# Altium PCB Power_Distribution_Board.PcbDoc
Units mm, origin at the board's own origin, x right, y up, seen from the top; angles counter-clockwise.
Board outline 90 x 100 mm, 4 copper layers (Top Layer, Int1 (GND), Int2 (GND), Bottom Layer), stack 1.369 mm thick; 35 components, 23 nets, 107 pads, 4 vias.
Unrouted connection lines stored in the file: 17.
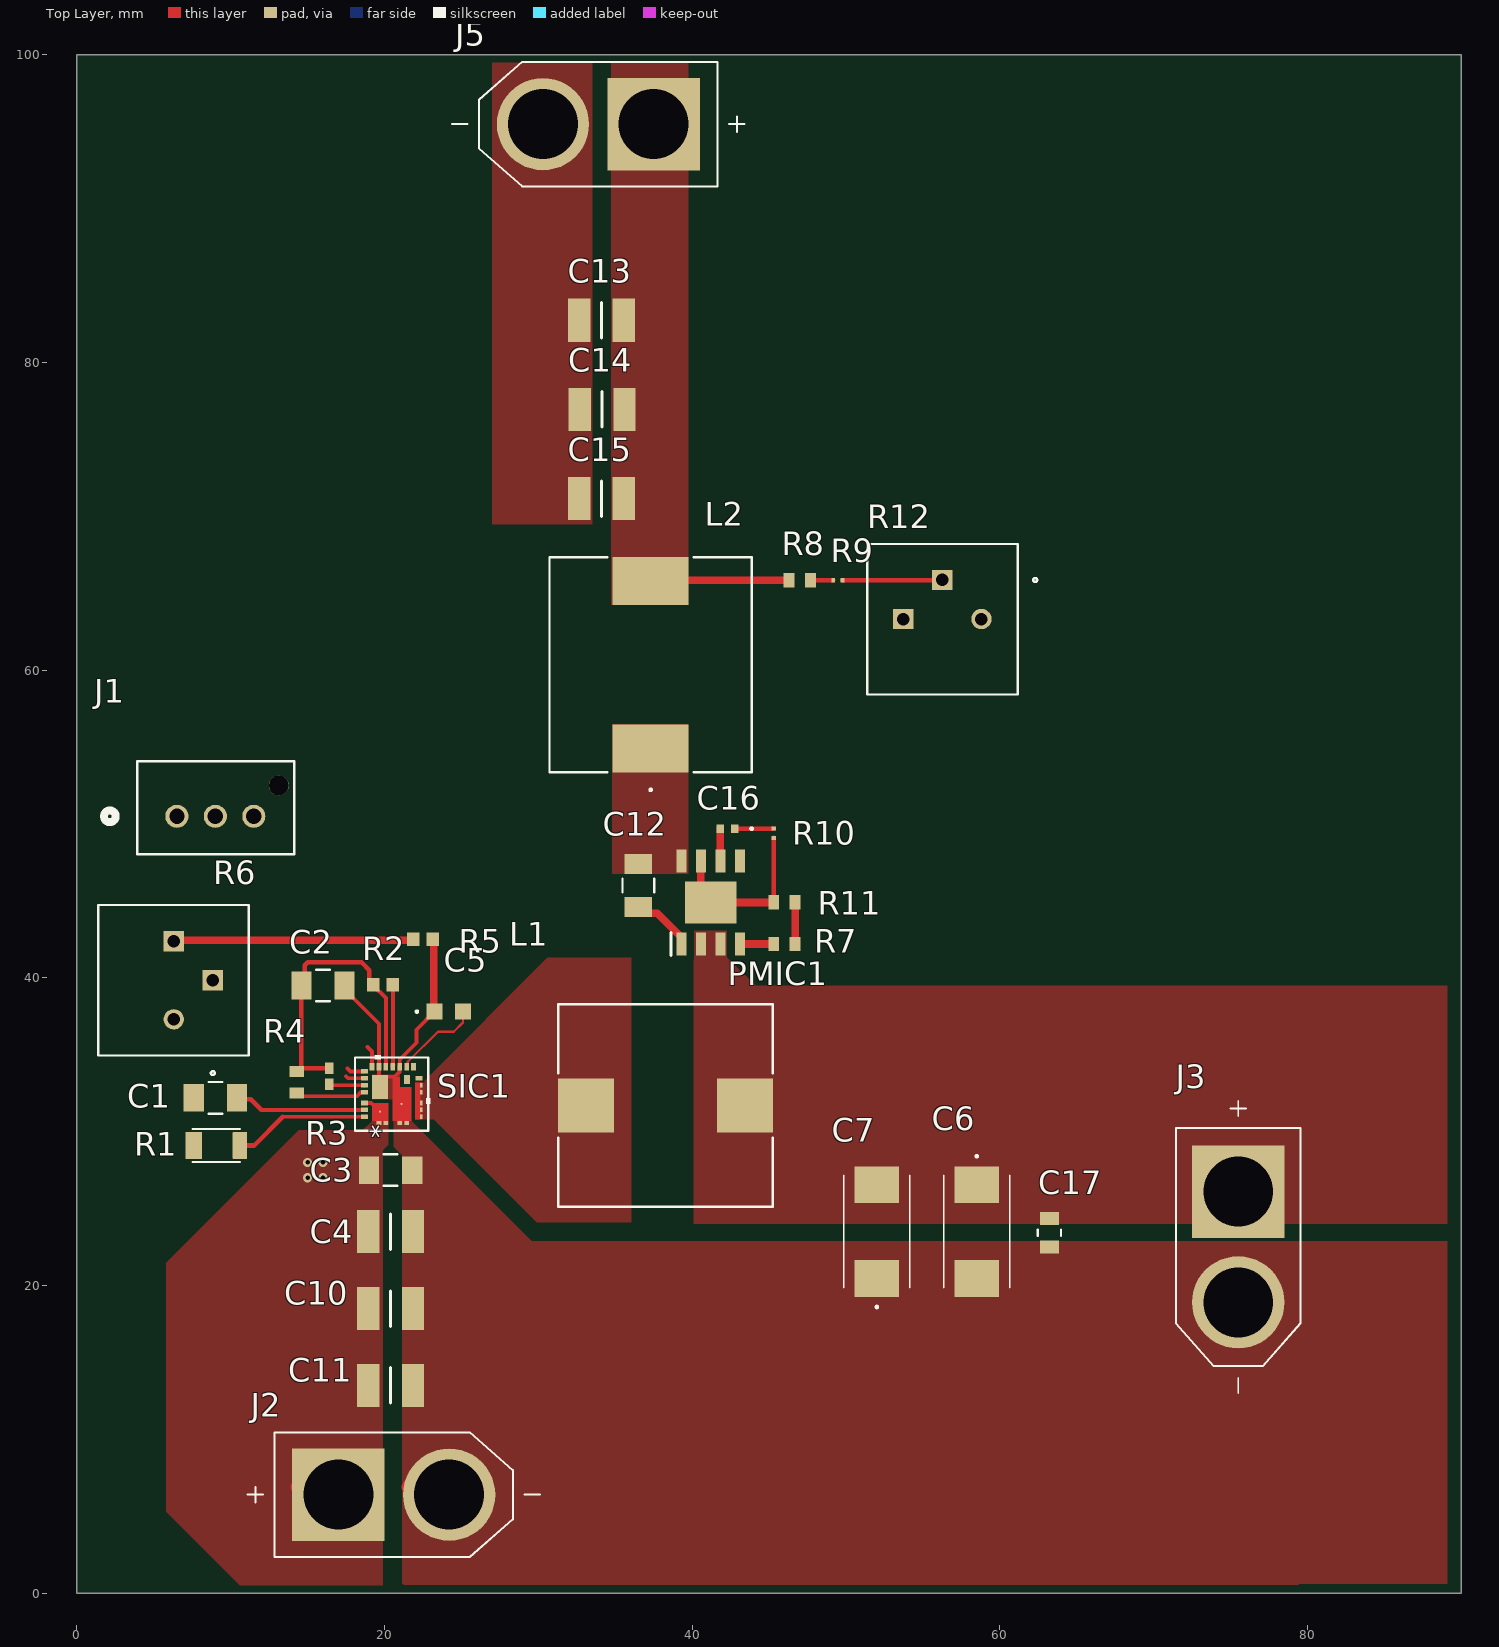
[diagram p0: Top Layer view]
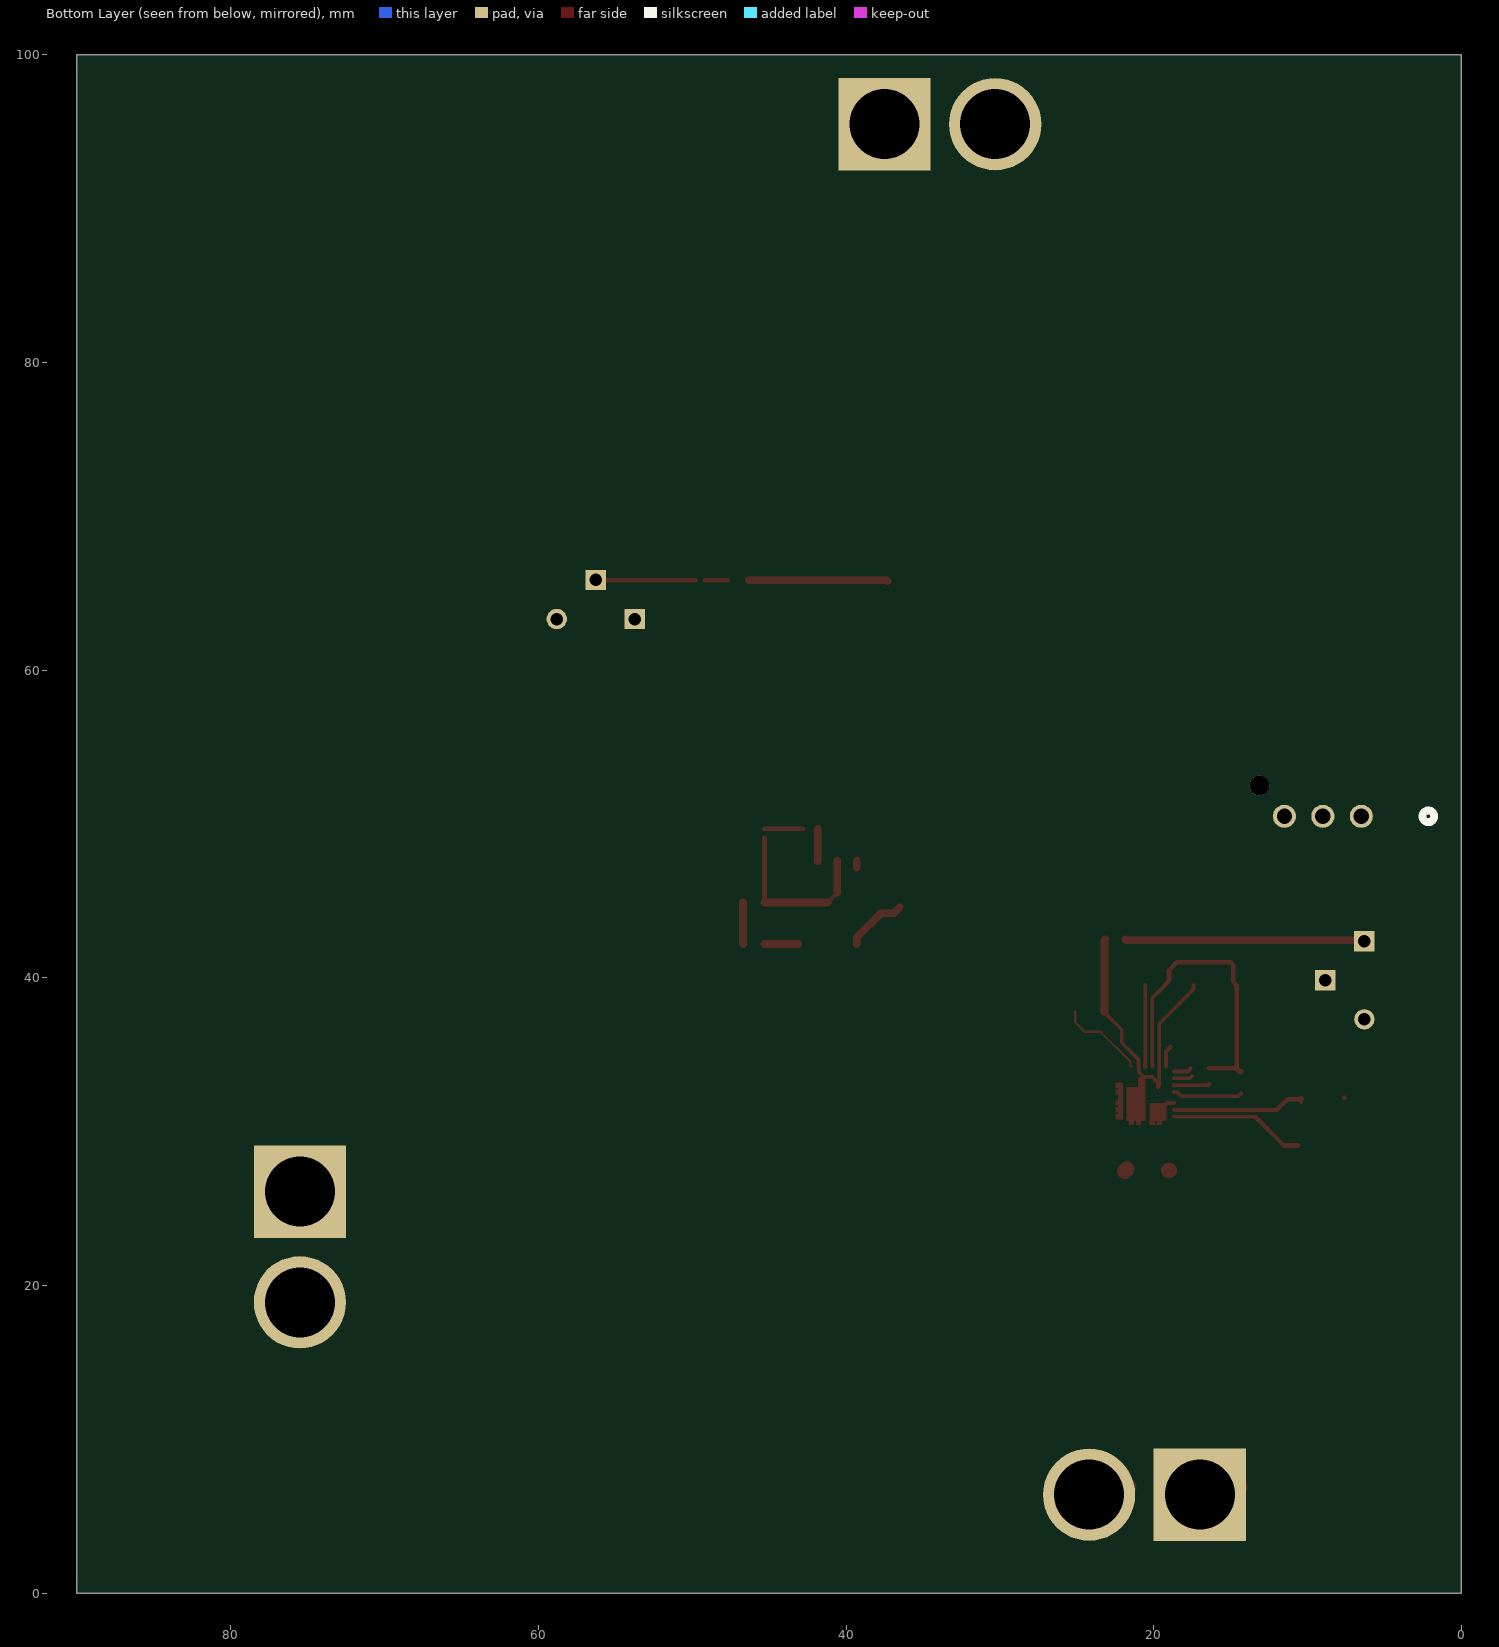
[diagram p1: Bottom Layer view, seen from below]
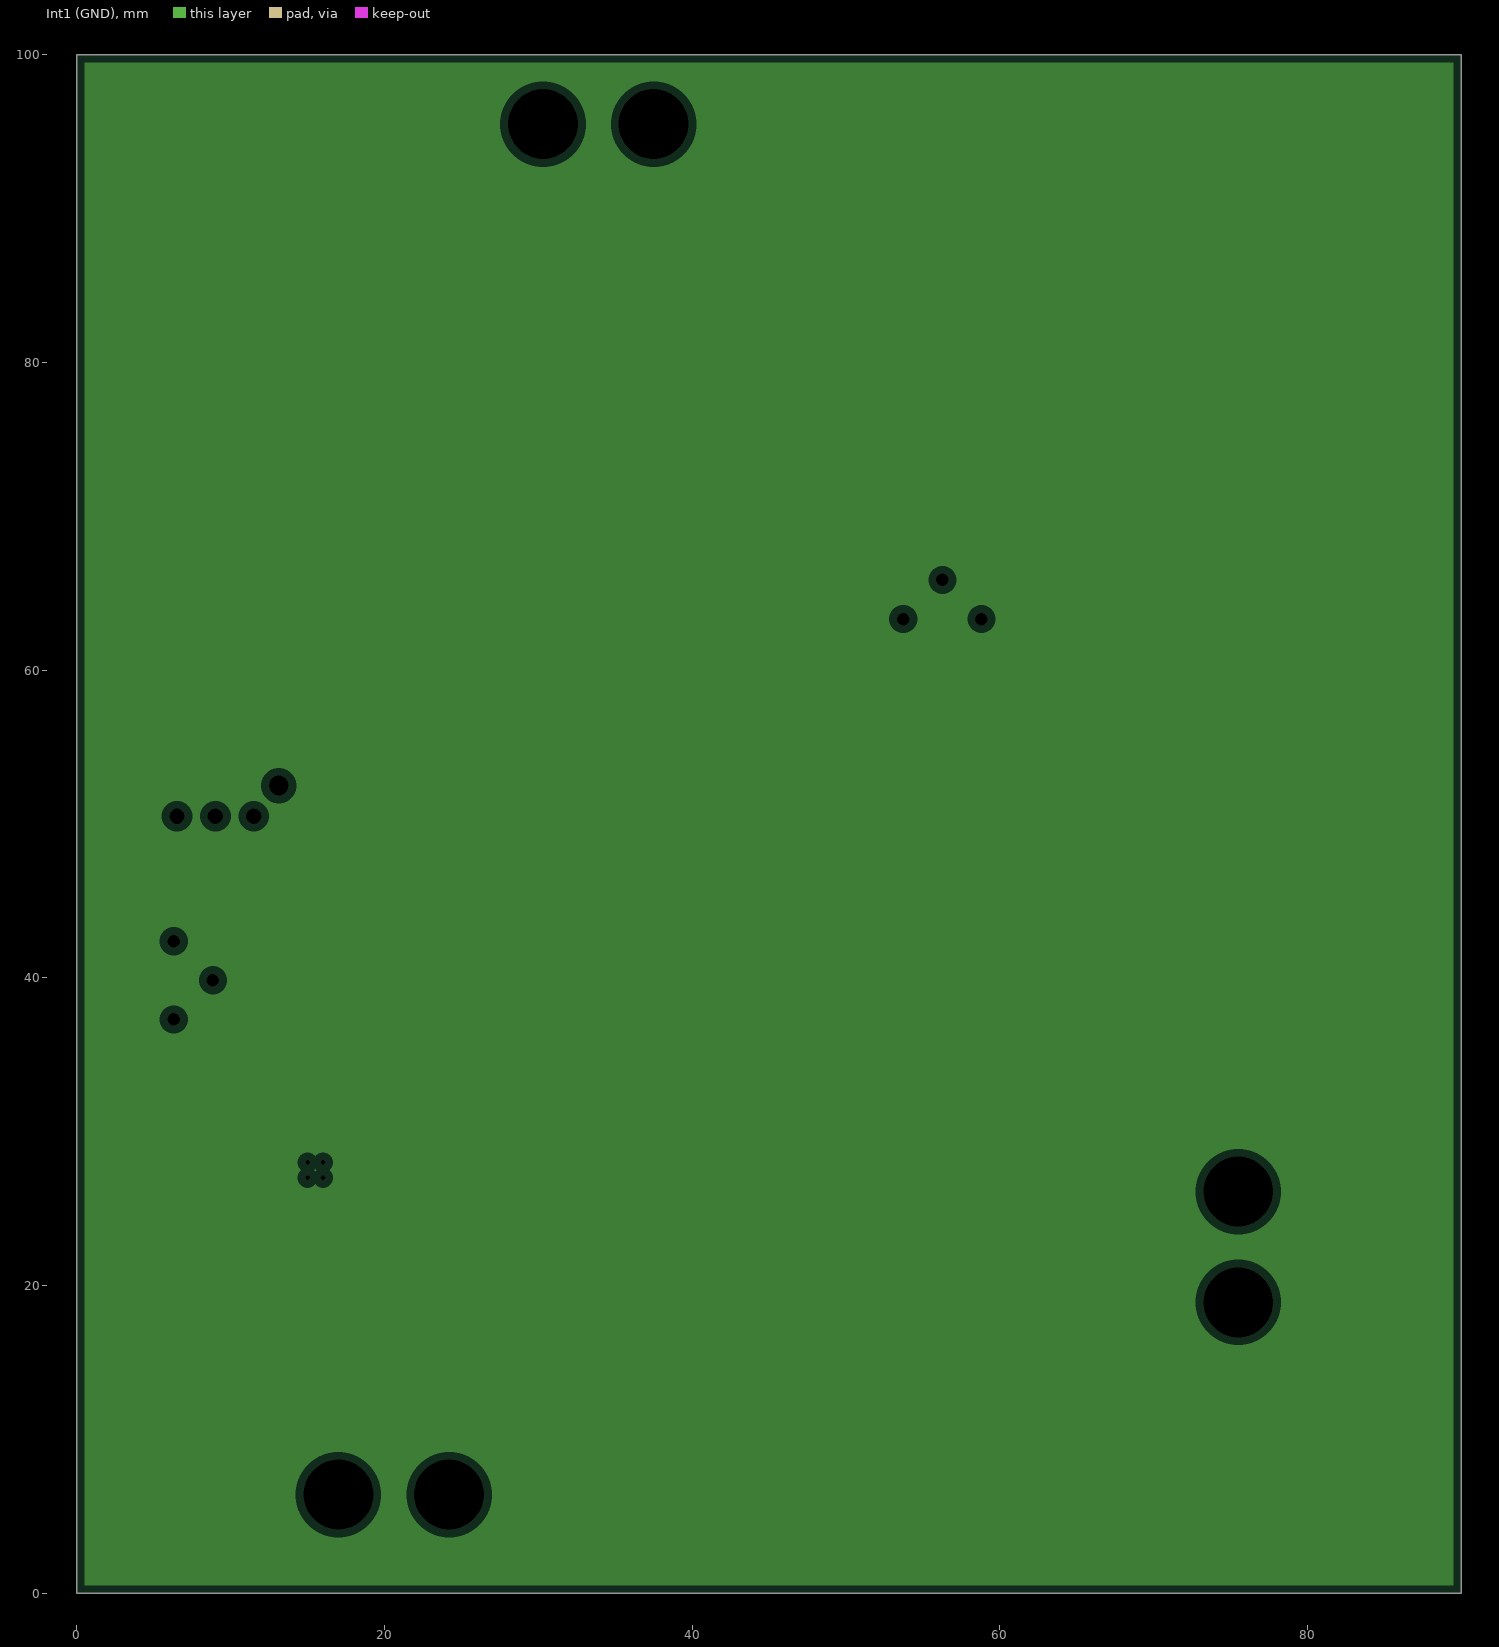
[diagram p2: Int1 (GND), clearances drawn from the general rule]
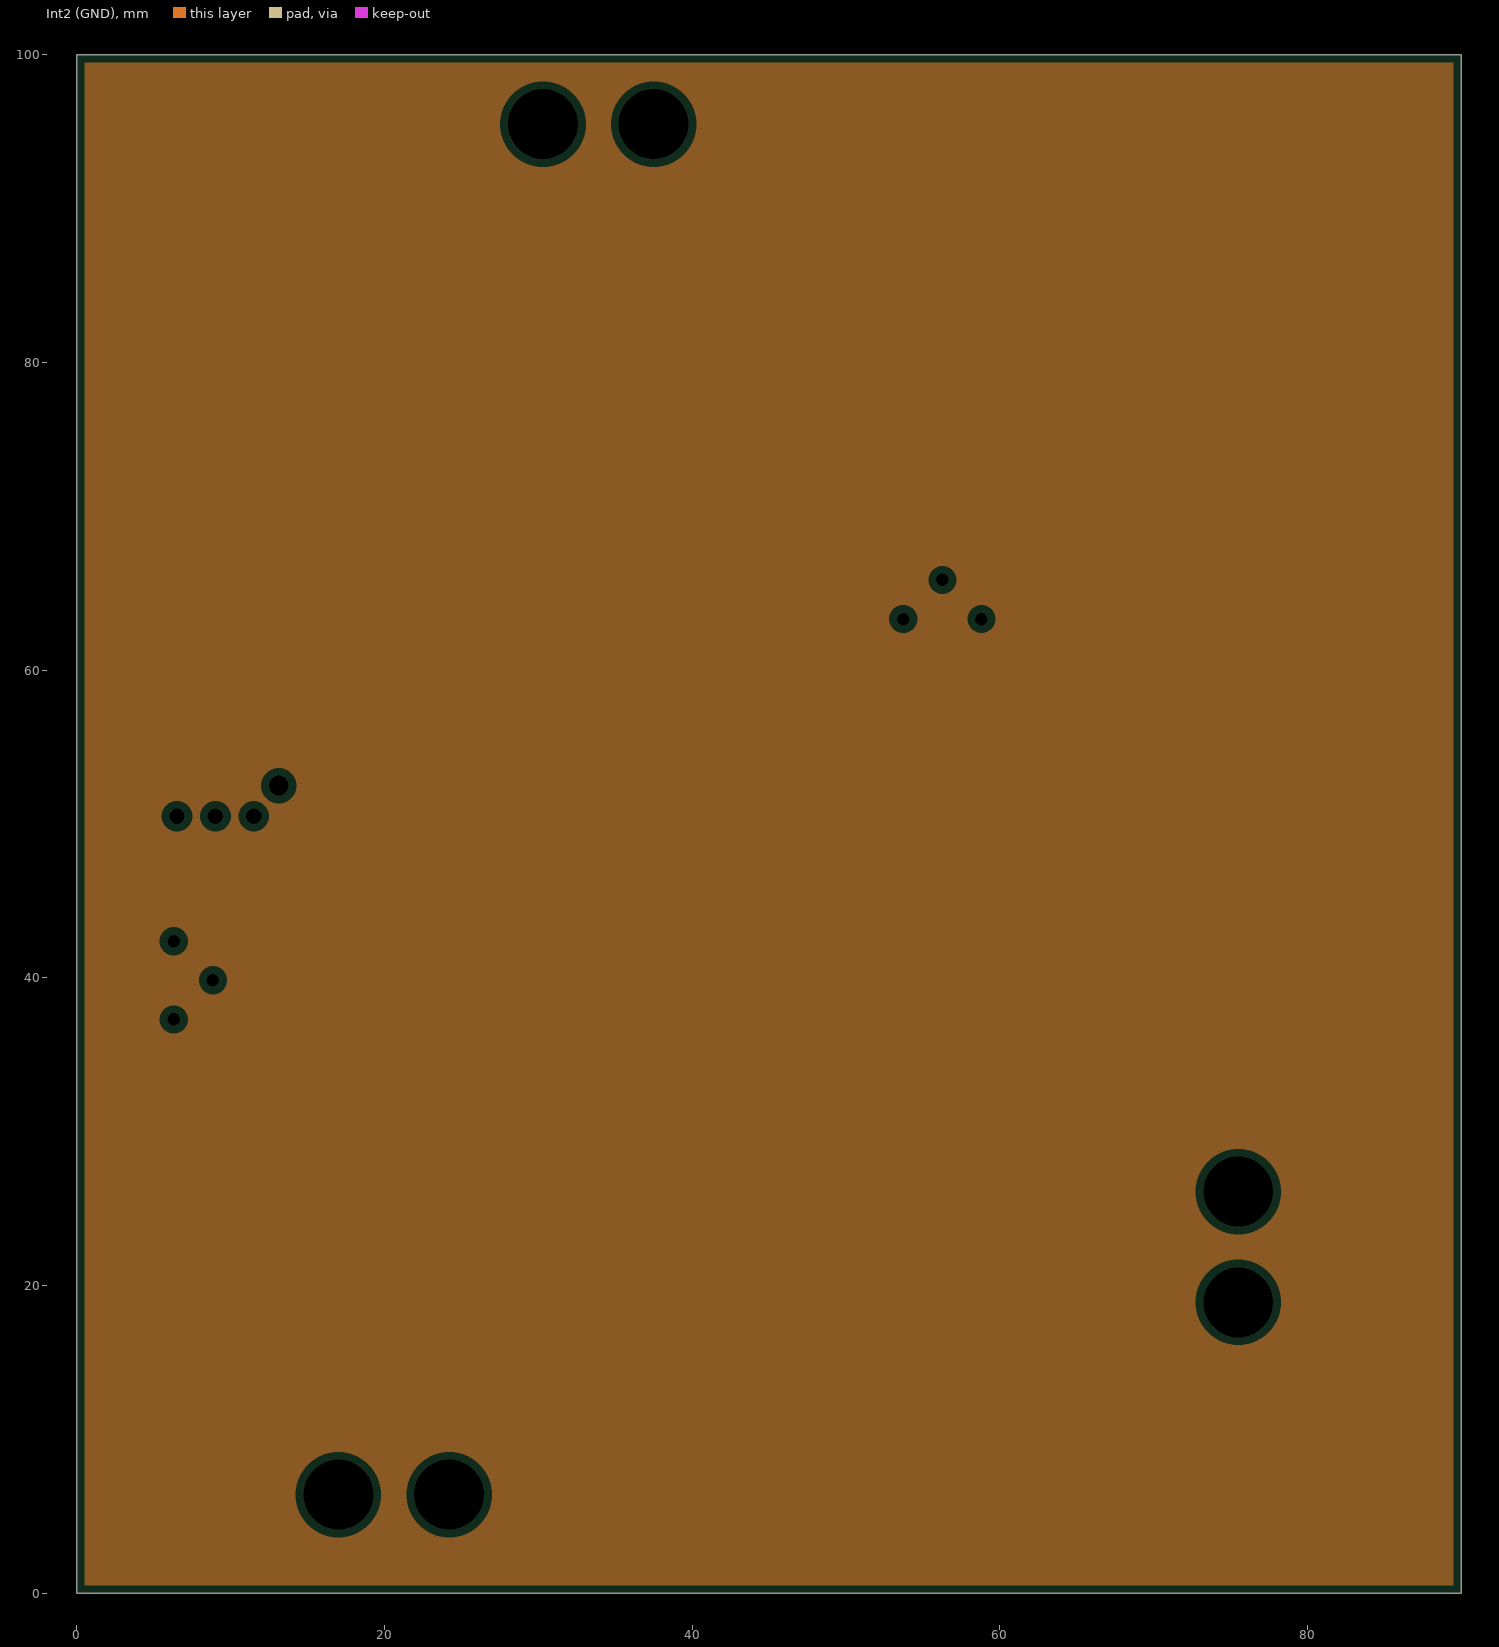
[diagram p3: Int2 (GND), clearances drawn from the general rule]
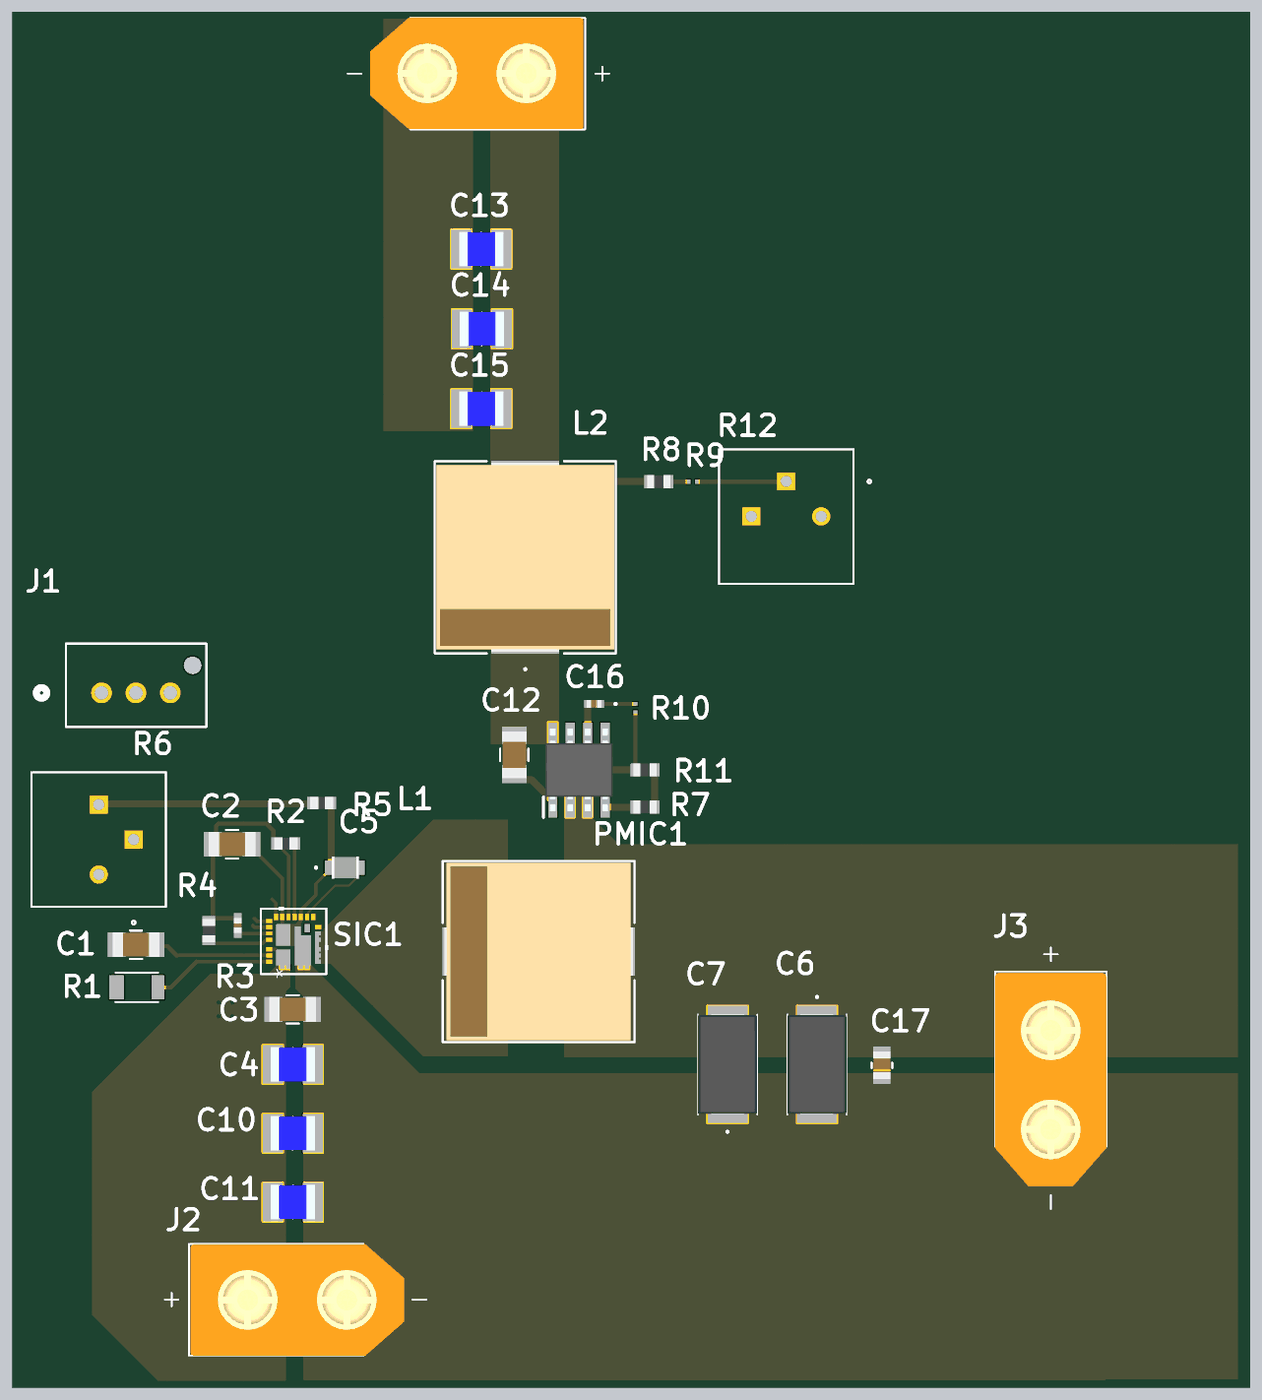
[diagram p4: 3D render of the assembled board from above, using the file's embedded part models]

## Layer stack, top to bottom
Top Solder: solder mask 0.0254, SM-001, Dk 4
Top Layer: signal copper 0.035
Dielectric 1: prepreg 0.1295, PP-017, Dk 4.3
Dielectric 2: prepreg 0.1295, PP-017, Dk 4.3
Int1 (GND): plane copper 0.035
Dielectric 3: core 0.7112, Core-039, Dk 4.8
Int2 (GND): plane copper 0.035
Dielectric 4: prepreg 0.1295, PP-017, Dk 4.3
Dielectric 5: prepreg 0.1295, PP-017, Dk 4.3
Bottom Layer: signal copper 0.035
Bottom Solder: solder mask 0.0254, SM-001, Dk 4

## Board outline
0,0 90,0 90,100 0,100

## Design rules (kind name [scope] priority, off if disabled: settings)
Clearance [All] p1: gap=0.15 ignorepadtopadclearanceinfootprint=FALSE
PlaneClearance [All] p1: clearance=0.508
PlaneConnect [All] p1: planeconnectstyle=Relief reliefexpansion=0.508 reliefentries=4 reliefconductorwidth=0.254 reliefairgap=0.254
PolygonConnect [All] p1: connectstyle=Direct reliefconductorwidth=0.254 reliefentries=4 polygonreliefangle="90 Angle" airgapwidth=0.254
RoutingVias [All] p1: holewidth=0.3 width=0.6 viastyle="Through Hole" minholewidth=0.3 minwidth=0.6 maxholewidth=0.3 maxwidth=0.6
SolderMaskExpansion [All] p1: expansion=0.102 istentingtop=FALSE
Width [All] p1: maxlimit=1 minlimit=0.15 preferedwidth=0.5
28 further rules are at their usual default settings.

## Components (designator, comment, footprint, x,y, rotation, side; value= is the part's Value field where it differs from the comment)
C1 "0.1uF" 0.1uF_CAPC340180_88N_KEM 9,32.2 r180 top
C2 "1uF" 1uF_CAPC340180_180N_KEM 16,39.5 r0 top
C3 "0.1uF" 0.1uF_CAPC340180_88N_KEM 20.4,27.5 r180 top
C4 "22uF" 22uF_INDC3225X280N 20.4,23.5 r180 top
C5 "4.7uF" 4.7uF_C2012_Commercial 24.175,37.8 r0 top
C6 "100uF" 100uF_Cap 58.5,23.5 r270 top
C7 "100uF" 100uF_Cap 52,23.5 r90 top
C10 "22uF" 22uF_INDC3225X280N 20.4,18.5 r180 top
C11 "22uF" 22uF_INDC3225X280N 20.4,13.5 r180 top
C12 "0.1uF" 0.1uF_CAPC340180_88N_KEM 36.5,46 r270 top
C13 "22uF" 22uF_INDC3225X280N 34.1,82.75 r0 top
C14 "22uF" 22uF_INDC3225X280N 34.15,76.95 r0 top
C15 "22uF" 22uF_INDC3225X280N 34.1,71.15 r0 top
C16 "2.7nF" 2.7nF_CAP_0402_N_WAL 42.3,49.7 r180 top
C17 "10uF" 10uF_CAP_CL21_SAM 63.225,23.425 r90 top
J1 "3Pin_HX_JST" HX_JST_CONN_B3B-XH-AM(LF)(SN)_JST 6.5,50.5 r0 top
J2 "IN_XT60-M" AMASS_XT60-M 20.6,6.4 r0 top
J3 "OUT_XT60-M" AMASS_XT60-M 75.5,22.5 r270 top
J5 "OUT_XT60-M" AMASS_XT60-M 33.9,95.5 r180 top
L1 "4.7uH" 4.7uH_SRP1270 38.269,31.7 r0 top
L2 "3.3uH" 3uH3_IND_IHLP-5050EZ_VIS 37.3,60.35 r90 top
PMIC1 "5Vout" SOIC127P600X163-9N 41.2,44.9 r90 top
R1 "2.2R" 2.2Ohm_RESC3115X65N 9.06,29.1 r0 top
R2 "10kR" 10kOhm_STA_RNCP0603_STP 19.9,39.55 r180 top
R3 "499kR" 499kOhm_RES_RMCF0402_STP 16.4,33.6 r90 top
R4 "100kR" 100kOhm_STA_RMCF0603_STP 14.3,33.225 r90 top
R5 "10kR" 10kOhm_STA_RNCP0603_STP 22.5,42.5 r0 top
R6 "RPot" POT_3386P 6.3,37.3 r90 top
R7 "100kR" 100kOhm_STA_RMCF0603_STP 46,42.2 r180 top
R8 "100kR" 100kOhm_STA_RMCF0603_STP 47,65.85 r180 top
R9 "15.8k Ohm" 15.8k_Ohm_RES_ERJ1GNF1582C 49.475,65.85 r180 top
R10 "15.8k Ohm" 15.8k_Ohm_RES_ERJ1GNF1582C 45.3,49.4 r90 top
R11 "100kR" 100kOhm_STA_RMCF0603_STP 46,44.9 r0 top
R12 "RPot" POT_3386P 58.805,63.325 r180 top
SIC1 "12Vout" SiC437-QFN 20.462,32.443 r90 top

## Footprints (in the part's own frame and the unit in brackets; to place one, negate y for a bottom-side part, rotate by r counter-clockwise, add the part's x,y. Pads: shape width x height; smd on the part's side, far side on the other; paste and mask are expansions set on the pad)
0.1uF_CAPC340180_88N_KEM [mm]
  rect 1.306x1.8 smd paste+0 mask+0: 1(-1.403,0) 2(1.403,0)
  silkscreen extent -0.44,-1.03 0.44,1.03, body extent -1.7,-0.9 1.7,0.9, height 0.88
1uF_CAPC340180_180N_KEM [mm]
  rect 1.306x1.8 smd paste+0 mask+0: 1(-1.403,0) 2(1.403,0)
  silkscreen extent -0.44,-1.03 0.44,1.03, body extent -1.7,-0.9 1.7,0.9, height 1.8
2.2Ohm_RESC3115X65N [mm]
  rrect14% 1.09x1.77 smd: 1(-1.465,0)
  rrect14% 0.94x1.77 smd: 2(1.54,0)
  silkscreen extent -1.55,-1.06 1.55,1.06
2.7nF_CAP_0402_N_WAL [mil]
  rect 20x22 smd paste+0 mask+0: 1(-18.5,0) 2(18.5,0)
  silkscreen extent -64,-3 -59,3, body extent -21,-11 21,11, height 22
3uH3_IND_IHLP-5050EZ_VIS [mil]
  rect 123x195 smd paste+0 mask+0: 1(-214.5,0) 2(214.5,0)
  silkscreen extent -323,-259 275,259, body extent -270,-254 270,254, height 199
4.7uF_C2012_Commercial [mm]
  rect 1.05x1.05 smd: 1(-0.925,0) 2(0.925,0)
  silkscreen extent -2.12,-0.05 -2.02,0.05, body extent -0.96,-0.8 1.04,0.8, height 1.25
4.7uH_SRP1270 [mil]
  rect 144x138 smd paste+0 mask+0: 1(-203.5,0) 2(203.5,0)
  silkscreen extent -274,-259 274,259, body extent -269,-254 269,254, height 278
10kOhm_STA_RNCP0603_STP [mil]
  rect 32x35 smd paste+0 mask+0: 1(-25.5,0) 2(25.5,0)
  body extent -34,-17 34,17, height 24
10uF_CAP_CL21_SAM [mm]
  rect 0.856x1.25 smd paste+0 mask+0: 1(-0.928,0) 2(0.928,0)
  silkscreen extent -0.19,-0.75 0.19,0.75, body extent -1,-0.63 1,0.63, height 1.35
15.8k_Ohm_RES_ERJ1GNF1582C [mm]
  rect 0.25x0.3 smd: 1(-0.3,0) 2(0.3,0)
22uF_INDC3225X280N [mm]
  rect 1.45x2.8 smd: 1(-1.45,0) 2(1.45,0)
  silkscreen extent 0,-1.15 0,1.15, body extent -1.6,-1.25 1.6,1.25, height 2.8
100kOhm_STA_RMCF0603_STP [mil]
  rect 28x37 smd paste+0 mask+0: 1(-27.5,0) 2(27.5,0)
  body extent -34,-19 34,19, height 22
100uF_Cap [mm]
  rect 2.4x2.9 smd: 1(-3.05,0) 2(3.05,0)
  silkscreen extent -4.95,-2.15 3.65,2.15, body extent 0,0 0,0, height 1.57
499kOhm_RES_RMCF0402_STP [mil]
  rect 30x22 smd paste+0 mask+0: 1(-20.5,0) 2(20.5,0)
  body extent -21,-11 21,11, height 14
AMASS_XT60-M [mm]
  round 6 hole 4.55: N(3.6,0)
  rect 6x6 hole 4.55: P(-3.6,0)
  silkscreen extent -9.5,-4.05 9.5,4.05, body extent -7.63,-4.06 7.87,4.04, height 16.01
HX_JST_CONN_B3B-XH-AM(LF)(SN)_JST [mil]
  round 59 hole 39 mask+0: 1(0,0) 2(98.43,0) 3(196.85,0)
  round 51 hole 51 unplated: 4(260.83,78.74)
  silkscreen extent -187,-97 300,141, body extent 0,0 10,10, height 10
POT_3386P [mil]
  round 52 hole 32 mask+0: 1(0,0)
  rect 52x52 hole 32 mask+0: 2(100,-100) 3(200,0)
  silkscreen extent -142,-192 292,193, body extent 0,0 10,10, height 10
SiC437-QFN [mil] "PMIC"
  rect 10x12 smd: 1(-73.74,32.48) 2(-73.74,14.76) 3(-73.74,-20.67) 4(-73.74,-38.39)
  rect 12x6 smd paste+0 mask+0: 5(-58.08,-75.74) 6(-40.36,-75.74) 7(-22.64,-75.74) 8(4.92,-75.74) 9(22.64,-75.74)
  rect 12x18 smd paste-6 mask+0: 10(40.36,-69.88) 18(58.08,69.88) 19(40.36,69.88) 20(22.64,69.88) 21(4.92,69.88) 22(-22.64,69.88) 23(-40.36,69.88) 24(-58.08,69.88)
  rect 18x12 smd paste-6 mask+0: 11(69.88,-56.1) 12(69.88,-38.39) 13(69.88,-20.67) 14(69.88,-2.95) 15(69.88,14.76) 16(69.88,32.48) 17(69.88,50.2)
  rect 62x41.34 smd paste+0 mask+0: 25(18.07,29.53)
  round 5 smd: 26(-45,30) 27(-25,-25)
  rect 22.84x14.96 smd: 28(37.65,-38.98)
  Top Layer region: -52.08,-78.74 -64.08,-78.74 -64.08,-60.88 28.64,-60.88 28.64,-78.74 16.64,-78.74 16.64,-72.74 10.92,-72.74 10.92,-78.74 -1.08,-78.74 -1.08,-72.74 -16.64,-72.74 -16.64,-78.74 -28.64,-78.74 -28.64,-72.74 -34.36,-72.74 -34.36,-78.74 -46.36,-78.74 -46.36,-72.74 -52.08,-72.74
  Top Layer region: -78.74,26.48 -78.74,38.48 -68.74,38.48 -68.74,50.2 -23.46,50.2 -23.46,8.86 -78.74,8.76 -78.74,20.76 -68.74,20.76 -68.74,26.48
  Top Layer region: 16.89,-50.22 -68.74,-50.22 -68.74,-44.39 -78.74,-44.39 -78.74,-32.39 -68.74,-32.39 -68.74,-26.67 -78.74,-26.67 -78.74,-14.67 -68.74,-14.67 -68.74,-2.97 42.48,-2.97 42.48,-20.89 16.89,-20.89
  silkscreen extent -94,-99 99,94
SOIC127P600X163-9N [mm]
  rect 1.5x0.65 smd: 1(-2.7,1.905) 2(-2.7,0.635) 3(-2.7,-0.635) 4(-2.7,-1.905) 5(2.7,-1.905) 6(2.7,-0.635) 7(2.7,0.635) 8(2.7,1.905)
  rect 2.71x3.35 smd: 9(0,0)
  silkscreen extent -3.45,2.58 -1.95,2.58, body extent -3,-2.45 3,2.45, height 1.63

## Part data
C1 C3 C12: library part C3216X7R2E104K160AA, "C Series 1206 0.1 uF 250 V ±10 % Tolerance X7R SMT Multilayer Ceramic Capacitor", Capacitance=100nF, Case Code (Imperial)=1206, Case Code (Metric)=3216, Dielectric=X7R, Manufacturer=TDK, Max Operating Temperature=125°C, Min Operating Temperature=-55°C, Package Quantity=1, Resistor Type=Ceramic, Tolerance=10%, Voltage=250V, Case/Package=1206, Category="Ceramic Capacitors", ComponentLink1Description=https://datasheet.ciiva.com/24216/c3216x7r2e104k160aa-265453-24216524.pdf?src-supplier=Mouser, ComponentLink1URL=https://datasheet.ciiva.com/24216/c3216x7r2e104k160aa-265453-24216524.pdf?src-supplier=Mouser, ComponentLink2Description=https://datasheet.ciiva.com/11788/0900766b80fc5cba-11788223.pdf?src-supplier=RSComponents, ComponentLink2URL=https://datasheet.ciiva.com/11788/0900766b80fc5cba-11788223.pdf?src-supplier=RSComponents, ComponentLink3Description=https://datasheet.ciiva.com/7975/1484596-7975133.pdf?src-supplier=Element14, ComponentLink3URL=https://datasheet.ciiva.com/7975/1484596-7975133.pdf?src-supplier=Element14, ComponentLink4Description=https://datasheet.ciiva.com/22684/1484596-22684136.pdf?src-supplier=Element14, ComponentLink4URL=https://datasheet.ciiva.com/22684/1484596-22684136.pdf?src-supplier=Element14, ComponentLink5Description=https://datasheet.ciiva.com/22694/1484596-22694168.pdf?src-supplier=Element14, ComponentLink5URL=https://datasheet.ciiva.com/22694/1484596-22694168.pdf?src-supplier=Element14, Depth=1.6mm, Height=1.6mm, Lead Free="Lead Free", Length=3.2mm, Manufacturer Part Number=C3216X7R2E104K160AA, Mount="Surface Mount", Number of Pins=2, Packaging="Tape and Reel", Pricing 1="1=0.23760, 10=0.19940, 25=0.17910, 50=0.15270 (USD)", REACH SVHC="No SVHC", RoHS=Yes, RoHS Compliant=Yes, Series=C, Stock 1=75, Supplier 1="Arrow Electronics", Supplier Part Number 1=C3216X7R2E104K160AA, Termination=SMD/SMT, Thickness=0.071inch, Voltage Rating=250V, Voltage Rating (DC)=250V, Weight=0.000571oz, Width=0.063inch
C2: library part C1206C105M1RACTU, "Cap Ceramic 1uF 100V X7R 20% Pad SMD 1206 125C T/R", Case Code (Imperial)=1206, Case Code (Metric)=3216, Dielectric=X7R, Dielectric Material=Ceramic, Manufacturer=KEMET, Max Operating Temperature=125°C, Min Operating Temperature=-55°C, Package Quantity=2000, Tolerance=20%, Voltage Rating=100V, Capacitance=1uF, Case/Package=1206, Category="Ceramic Capacitors", ComponentLink1Description=http://www.farnell.com/datasheets/2746623.pdf?src-supplier=Farnell, ComponentLink1URL=http://www.farnell.com/datasheets/2746623.pdf?src-supplier=Farnell, ComponentLink2Description=http://www.mouser.com/ds/2/212/KEM_C1002_X7R_SMD-357932.pdf?src-supplier=Mouser, ComponentLink2URL=http://www.mouser.com/ds/2/212/KEM_C1002_X7R_SMD-357932.pdf?src-supplier=Mouser, ComponentLink3Description=https://api.kemet.com/component-edge/download/datasheet/C1206C105M1RACTU.pdf?src-supplier=Digi-Key, ComponentLink3URL=https://api.kemet.com/component-edge/download/datasheet/C1206C105M1RACTU.pdf?src-supplier=Digi-Key, ComponentLink4Description=http://www.kemet.com/docfinder?Partnumber=C1206C105M1RACTU&src-supplier=Digi-Key, ComponentLink4URL=http://www.kemet.com/docfinder?Partnumber=C1206C105M1RACTU&src-supplier=Digi-Key, ComponentLink5Description=http://www.farnell.com/datasheets/2746623.pdf?src-supplier=Newark, ComponentLink5URL=http://www.farnell.com/datasheets/2746623.pdf?src-supplier=Newark, Height=1.6mm, Length=0.126inch, Manufacturer Part Number=C1206C105M1RACTU, Mount="Surface Mount", Packaging="Tape and Reel", Pricing 1="1=0.55430, 10=0.53360, 25=0.51300, 100=0.49230, 250=0.47160, 500=0.45100, 1000=0.43020, 3000=0.40960 (USD)", RoHS=Yes, RoHS Compliant=Yes, Stock 1=3208, Supplier 1="Arrow Electronics", Supplier Part Number 1=C1206C105M1RACTU, Termination=SMD/SMT, Thickness=0.071inch, Voltage Rating (DC)=100V, Weight=0.000571oz, Width=1.6mm
C4 C10 C11 C13 C14 C15: library part CL32B226KOJNNNE, "Cap Ceramic 22uF 16V X7R 10% Pad SMD 1210 125°C Low ESR T/R", Case Code (Imperial)=1210, Case Code (Metric)=3225, Dielectric=X7R, Manufacturer=Samsung, Max Operating Temperature=125°C, Min Operating Temperature=-55°C, Package Quantity=1, Tolerance=10%, Voltage=10V, Voltage Rating=16V, Capacitance=22uF, Case/Package=1210, Category="Ceramic Capacitors", ComponentLink1Description=https://datasheet.ciiva.com/25723/cl32b226kojnnne-25723543.pdf?src-supplier=Digi-Key, ComponentLink1URL=https://datasheet.ciiva.com/25723/cl32b226kojnnne-25723543.pdf?src-supplier=Digi-Key, ComponentLink2Description=https://datasheet.ciiva.com/16437/cl32b226kojnnne-16437176.pdf?src-supplier=Future+Electronics, ComponentLink2URL=https://datasheet.ciiva.com/16437/cl32b226kojnnne-16437176.pdf?src-supplier=Future+Electronics, ComponentLink3Description=https://datasheet.ciiva.com/29241/450727-da-01-en-vs-kondensator-1210-29241803.pdf?src-supplier=Conrad, ComponentLink3URL=https://datasheet.ciiva.com/29241/450727-da-01-en-vs-kondensator-1210-29241803.pdf?src-supplier=Conrad, Construction=Flat, Depth=2.5mm, Height=2.5mm, Lead Free="Lead Free", Length=3.2mm, Manufacturer Part Number=CL32B226KOJNNNE, Material=Ceramic, Mount="Surface Mount", Packaging="Tape and Reel", Pricing 1="1=0.46920, 10=0.36690, 25=0.36330, 100=0.22440, 250=0.21920, 500=0.17290, 1000=0.13530, 3000=0.11780, 6000=0.11660, 15000=0.11540, 30000=0.10380, 75000=0.09510 (USD)", Radiation Hardening=No, RoHS=Yes, RoHS Compliant=Yes, Series=CL, Stock 1=85127, Supplier 1="Arrow Electronics", Supplier Part Number 1=CL32B226KOJNNNE, Thickness=0.106inch, Voltage Rating (DC)=16V, Width=0.098inch
C5: library part C2012X5R1H475K125AB, "Multilayer Ceramic Capacitors MLCC - SMD/SMT 4.7uF 50V 0805 RoHS", Case Code (Imperial)=0805, Case Code (Metric)=2012, Dielectric=X5R, Dielectric Material=Ceramic, Manufacturer=TDK, Max Operating Temperature=85°C, Min Operating Temperature=-55°C, Package Quantity=1, Tolerance=10%, Voltage=50V, Capacitance=4.7uF, Case/Package=0805, Category="Ceramic Capacitors", ComponentLink1Description=https://datasheet.ciiva.com/24216/c2012x5r1h475k125ab-265006-24216434.pdf?src-supplier=Mouser, ComponentLink1URL=https://datasheet.ciiva.com/24216/c2012x5r1h475k125ab-265006-24216434.pdf?src-supplier=Mouser, ComponentLink2Description=https://datasheet.ciiva.com/22725/1913358-22725564.pdf?src-supplier=Element14, ComponentLink2URL=https://datasheet.ciiva.com/22725/1913358-22725564.pdf?src-supplier=Element14, ComponentLink3Description=https://datasheet.ciiva.com/28673/mlcc-commercial-general-en-28673541.pdf?src-supplier=Element14, ComponentLink3URL=https://datasheet.ciiva.com/28673/mlcc-commercial-general-en-28673541.pdf?src-supplier=Element14, ComponentLink4Description=https://datasheet.ciiva.com/6276/tdkmlcccaprange-6276526.pdf?src-supplier=Digi-Key, ComponentLink4URL=https://datasheet.ciiva.com/6276/tdkmlcccaprange-6276526.pdf?src-supplier=Digi-Key, Construction=Flat, Depth=1.25mm, Height=1.25mm, Lead Free="Lead Free", Length=2mm, Manufacturer Part Number=C2012X5R1H475K125AB, Mount="Surface Mount", Packaging="Tape and Reel", Pricing 1="2000=0.18320 (USD)", Radiation Hardening=No, REACH SVHC="No SVHC", Resistor Type=Ceramic, RoHS=Yes, RoHS Compliant=Yes, Series=C, Stock 1=222000, Supplier 1="Arrow Electronics", Supplier Part Number 1=C2012X5R1H475K125AB, Termination=SMD/SMT, Thickness=0.057inch, Voltage Rating=50V, Voltage Rating (DC)=50V, Weight=0.000194oz, Width=0.049inch
C6 C7: "20TQC100MYF Cap Tant Solid 100uF 20V D3L CASE 20% (7.3 X 4.3 X 2.8mm) SMD 7343 0.055 Ohm 105 C Embossed T/R", Case Code (Imperial)=2917, Case Code (Metric)=7343, ESR (Equivalent Series Resistance)=55mR, Leakage Current=200uA, Manufacturer=Panasonic, Manufacturer Part Number=20TQC100MYF, Max Operating Temperature=105°C, Min Operating Temperature=-55°C, Package Quantity=2500, Ripple Current=1.7A, Supplier Part Number 1=7955749, Tolerance=20%, Voltage=20V, Capacitance=100uF, Case/Package=2917, Category="Polymer Capacitors", ComponentLink1Description=https://datasheet.ciiva.com/48675/aaa8000ce14-48675007.pdf?src-supplier=Avnet, ComponentLink1URL=https://datasheet.ciiva.com/48675/aaa8000ce14-48675007.pdf?src-supplier=Avnet, ComponentLink2Description=https://datasheet.ciiva.com/25784/1734368-25784989.pdf?src-supplier=Farnell, ComponentLink2URL=https://datasheet.ciiva.com/25784/1734368-25784989.pdf?src-supplier=Farnell, ComponentLink3Description=https://datasheet.ciiva.com/22745/1734368-22745210.pdf?src-supplier=Element14, ComponentLink3URL=https://datasheet.ciiva.com/22745/1734368-22745210.pdf?src-supplier=Element14, Depth=4.3mm, Dissipation Factor=10%, Features="General Purpose", Height=2.8mm, Height - Seated (Max)=0.114inch, Lead Free="Lead Free", Length=7.3mm, Life (Hours)=2000Hour, Mount="Surface Mount", Packaging="Tape and Reel", Polarity=Polar, Pricing 1="2=4.40300, 26=3.55400, 126=2.76100, 626=2.04200, 1250=1.91900 (USD)", Radiation Hardening=No, Reach SVHC Compliant=No, RoHS=Yes, RoHS Compliant=Yes, Stock 1=1, Supplier 1=RSComponents, Termination=SMD/SMT, Voltage Rating=20V, Voltage Rating (DC)=20V, Width=0.169inch
C16: library part "2.7nF Capacitor", "0402 2.7 nF 50 V ±10 % Tolerance X7R Surface Mount Multilayer Ceramic Capacitor", Case Code (Imperial)=0402, Case Code (Metric)=1005, Dielectric=X7R, Manufacturer="Walsin Technologies", Manufacturer Part Number=0402B272K500CT, Max Operating Temperature=125°C, Min Operating Temperature=-55°C, Tolerance=10%, Voltage Rating=50V, Capacitance=2.7nF, Case/Package=0402, Category="Ceramic Capacitors", ComponentLink1Description=http://www.farnell.com/datasheets/2340522.pdf?src-supplier=Farnell, ComponentLink1URL=http://www.farnell.com/datasheets/2340522.pdf?src-supplier=Farnell, ComponentLink2Description=http://www.passivecomponent.com/wp-content/uploads/2018/10/MLCC.pdf?src-supplier=Digi-Key, ComponentLink2URL=http://www.passivecomponent.com/wp-content/uploads/2018/10/MLCC.pdf?src-supplier=Digi-Key, ComponentLink3Description=http://www.farnell.com/datasheets/2340522.pdf?src-supplier=Element14, ComponentLink3URL=http://www.farnell.com/datasheets/2340522.pdf?src-supplier=Element14, ComponentLink4Description=http://www.farnell.com/datasheets/2340522.pdf?src-supplier=Newark, ComponentLink4URL=http://www.farnell.com/datasheets/2340522.pdf?src-supplier=Newark, Depth=0.5mm, Lead Free="Lead Free", Length=1mm, Packaging="Tape and Reel", Pricing 1="10000=0.00560, 20000=0.00550, 50000=0.00540, 100000=0.00450 (USD)", REACH SVHC=Unknown, RoHS=Yes, RoHS Compliant=Yes, Stock 1=20000, Supplier 1="Arrow Electronics", Supplier Part Number 1=0402B272K500CT, Voltage Rating (DC)=50V
C17: "10 uF Capacitor", Case Code (Imperial)=0805, Case Code (Metric)=2012, Dielectric=X7R, Manufacturer=Samsung, Manufacturer Part Number=CL21A106KOQNNNE, Max Operating Temperature=85°C, Min Operating Temperature=-55°C, Package Quantity=1, Tolerance=10%, Voltage=16V, Capacitance=10uF, Case/Package=0805, Category="Ceramic Capacitors", ComponentLink1Description=https://datasheet.ciiva.com/25798/cl21a106koqnnne-25798133.pdf?src-supplier=Digi-Key, ComponentLink1URL=https://datasheet.ciiva.com/25798/cl21a106koqnnne-25798133.pdf?src-supplier=Digi-Key, Construction=Flat, Depth=1.25mm, Height=1.25mm, Lead Free="Lead Free", Length=2mm, Mount="Surface Mount", Packaging="Tape and Reel", Pricing 1="2000=0.02030, 4000=0.01630, 10000=0.01580, 14000=0.01420, 50000=0.00990 (USD)", Radiation Hardening=No, RoHS=Yes, RoHS Compliant=Yes, Series=CL, Stock 1=1696000, Supplier 1="Arrow Electronics", Supplier Part Number 1=CL21A106KOQNNNE, Thickness=0.055inch, Voltage Rating=16V, Voltage Rating (DC)=16V, Width=0.049inch
J1: library part B3B-XH-AM(LF)(SN), "3 Pin HX JST connector", Mfr_Name=JST, Copyright="Copyright (C) 2022 Ultra Librarian. All rights reserved.", Digi-Key_Part_Number_1=455-2231-ND, Manufacturer_Part_Number=B3B-XH-AM(LF)(SN), RefDes=RefDes, Type=DEV
J2 J3 J5: library part XT60-M, "Plug; DC supply; XT60; male; PIN: 2; for cable; soldered; 30A; 500V", Package=Package, Availability="Not in stock", Check_prices=https://www.snapeda.com/parts/XT60-M/AMASS/view-part/?ref=eda, MF=AMASS, MP=XT60-M, Price=None, SnapEDA_Link=https://www.snapeda.com/parts/XT60-M/AMASS/view-part/?ref=snap
L1: library part SRP1270-4R7M, "Inductor Power Shielded Wirewound 4.7uH 20% 100KHz Iron 15A 0.0112Ohm DCR T/R", Case/Package=1270, Current=35A, Current Rating=15A, DC Resistance (DCR)=11.2mR, Inductance Tolerance=20%, Manufacturer=Bourns, Max Operating Temperature=125°C, Min Operating Temperature=-55°C, Package Quantity=400, Resistor Type=Wirewound, Saturation Current=30A, Self Resonant Frequency=15MHz, Test Frequency=100kHz, Category="Fixed Inductors", ComponentLink1Description=https://datasheet.ciiva.com/11803/0900766b80f2b679-11803001.pdf?src-supplier=RSComponents, ComponentLink1URL=https://datasheet.ciiva.com/11803/0900766b80f2b679-11803001.pdf?src-supplier=RSComponents, ComponentLink2Description=https://datasheet.ciiva.com/8515/srp1270-8515814.pdf?src-supplier=Avnet, ComponentLink2URL=https://datasheet.ciiva.com/8515/srp1270-8515814.pdf?src-supplier=Avnet, ComponentLink3Description=https://datasheet.ciiva.com/8517/srp1270-8517062.pdf?src-supplier=Avnet, ComponentLink3URL=https://datasheet.ciiva.com/8517/srp1270-8517062.pdf?src-supplier=Avnet, ComponentLink4Description=https://datasheet.ciiva.com/17045/70277161-17045933.pdf?src-supplier=Allied+Electronics, ComponentLink4URL=https://datasheet.ciiva.com/17045/70277161-17045933.pdf?src-supplier=Allied+Electronics, ComponentLink5Description=https://datasheet.ciiva.com/7849/1834359-7849561.pdf?src-supplier=Element14, ComponentLink5URL=https://datasheet.ciiva.com/7849/1834359-7849561.pdf?src-supplier=Element14, ComponentLink6Description=https://datasheet.ciiva.com/30242/484srp1270-30242620.pdf?src-supplier=Onlinecomponents.com, ComponentLink6URL=https://datasheet.ciiva.com/30242/484srp1270-30242620.pdf?src-supplier=Onlinecomponents.com, Core Material=Ferrite, DC Current=15A, Depth=13.7mm, Height=7mm, Height - Seated (Max)=0.276inch, Inductance=4.7uH, Length=13.7mm, Manufacturer Part Number=SRP1270-4R7M, Max DC Current=15A, Military Standard=Not, Mount="Surface Mount", Number of Pins=2, Packaging="Tape and Reel", Pricing 1="400=1.01530, 800=0.90440, 1200=0.87660, 2800=0.82390, 10000=0.79300 (USD)", REACH SVHC="No SVHC", RMS Current (Irms)=15A, RoHS=Yes, RoHS Compliant=Yes, Series=SRP1270, Shielding=Shielded, Stock 1=800, Supplier 1="Arrow Electronics", Supplier Part Number 1=SRP1270-4R7M, Termination=SMD/SMT, Tolerance=20%, Width=13.7mm
L2: "Inductor High Current Shielded Wirewound 3.3uH 20% 100KHz 15A 9.2mOhm DCR 5050 T/R", Case/Package=5050, Current Rating=15A, DC Resistance (DCR)=9.2mR, Inductance Tolerance=20%, Manufacturer="Vishay Dale", Manufacturer Part Number=IHLP5050EZER3R3M01, Max Operating Temperature=125°C, Min Operating Temperature=-55°C, Package Quantity=250, Saturation Current=32A, Self Resonant Frequency=5MHz, Test Frequency=100kHz, Category="Fixed Inductors", ComponentLink1Description=https://datasheet.ciiva.com/5706/425636-5706896.pdf?src-supplier=Farnell, ComponentLink1URL=https://datasheet.ciiva.com/5706/425636-5706896.pdf?src-supplier=Farnell, ComponentLink2Description=https://datasheet.ciiva.com/3082/ih50ez01-3082034.pdf?src-supplier=Avnet, ComponentLink2URL=https://datasheet.ciiva.com/3082/ih50ez01-3082034.pdf?src-supplier=Avnet, ComponentLink3Description=https://datasheet.ciiva.com/17113/70201670-17113196.pdf?src-supplier=Allied+Electronics, ComponentLink3URL=https://datasheet.ciiva.com/17113/70201670-17113196.pdf?src-supplier=Allied+Electronics, ComponentLink4Description=https://datasheet.ciiva.com/8017/425636-8017387.pdf?src-supplier=Element14, ComponentLink4URL=https://datasheet.ciiva.com/8017/425636-8017387.pdf?src-supplier=Element14, Core Material=Ferrite,Metal,Composite, Depth=12.9mm, Height=5mm, Height - Seated (Max)=0.197inch, Inductance=3.3uH, Lead Free="Lead Free", Length=13.2mm, Max DC Current=15A, Military Standard=Not, Mount="Surface Mount", Number of Pins=5050, Packaging="Tape and Reel", Pricing 1="250=1.14650, 500=1.05640 (USD)", Radiation Hardening=No, Rated Current-Max=15A, REACH SVHC=Unknown, RMS Current (Irms)=15A, RoHS=Yes, RoHS Compliant=Yes, Series=IHLP-5050EZ-01, Shielding=Shielded, Stock 1=2750, Supplier 1="Arrow Electronics", Supplier Part Number 1=IHLP5050EZER3R3M01, Termination=SMD/SMT, Tolerance=20%, Width=12.9mm
PMIC1: library part AP64500, "AP64500 Series 40 V 5 A 2.2 MHz Synchronous Buck Converter - SOIC-8EP", Manufacturer=Diodes, Manufacturer Part Number=AP64500SP-13, Category="Voltage Regulators - Switching", Pricing 1="1=2.38960, 10=2.13660, 25=2.00130, 100=1.69720, 250=1.57640, 500=1.37310, 1000=1.12610, 3000=1.11430 (USD)", RoHS=Yes, Stock 1=2170, Supplier 1="Arrow Electronics", Supplier Part Number 1=AP64500SP-13
R1: library part CRG1206F2R2, "Thick Film Resistors - SMD CRG1206 1% 2R2", Case Code (Imperial)=1206, Case Code (Metric)=3216, Manufacturer="TE Connectivity", Max Operating Temperature=155°C, Max Power Dissipation=250mW, Min Operating Temperature=-55°C, Number of Resistors=1, Resistor Type="Thick Film", Supplier Part Number 1=20R2301, Temperature Coefficient=200ppm/°C, Tolerance=1%, Voltage Rating=200V, Case/Package=1206, Category="Chip SMD Resistors", ComponentLink1Description=http://www.mouser.com/ds/2/418/NG_CD_1623481_BA-677627.pdf?src-supplier=Mouser, ComponentLink1URL=http://www.mouser.com/ds/2/418/NG_CD_1623481_BA-677627.pdf?src-supplier=Mouser, ComponentLink2Description=https://www.te.com/commerce/DocumentDelivery/DDEController?Action=srchrtrv&amp;DocNm=1773204&amp;DocType=DS&amp;DocLang=English&src-supplier=Digi-Key, ComponentLink2URL=https://www.te.com/commerce/DocumentDelivery/DDEController?Action=srchrtrv&amp;DocNm=1773204&amp;DocType=DS&amp;DocLang=English&src-supplier=Digi-Key, ELV=Compliant, Height=0.55mm, Length=3.1mm, Manufacturer Part Number=CRG1206F2R2, Mount="Surface Mount", Number of Terminations=2, Packaging="Tape and Reel", Power Rating=250mW, Pricing 1="10000=0.03200, 20000=0.03200, 40000=0.03100, 60000=0.03000, 100000=0.02900 (USD)", Resistance=2.2R, RoHS=Yes, RoHS Compliant=Yes, Series="CRG, Neohm", Supplier 1=Newark, Termination=Solder, Width=1.55mm
R2 R5: library part RNCP0603FTD10K0, "Res Thin Film 0603 10K Ohm 1% 1/8W ±100ppm/°C Molded SMD SMD Paper T/R", Case Code (Imperial)=0603, Case Code (Metric)=1608, Manufacturer="Stackpole Electronics", Max Operating Temperature=155°C, Max Power Dissipation=125mW, Min Operating Temperature=-55°C, Resistor Type="Thin Film", Temperature Coefficient=100ppm/°C, Tolerance=1%, Case/Package=0603, Category="Chip SMD Resistors", ComponentLink1Description=https://www.seielect.com/Catalog/SEI-rncp.pdf?src-supplier=Avnet, ComponentLink1URL=https://www.seielect.com/Catalog/SEI-rncp.pdf?src-supplier=Avnet, ComponentLink2Description=https://www.seielect.com/Catalog/SEI-rncp.pdf?src-supplier=Digi-Key, ComponentLink2URL=https://www.seielect.com/Catalog/SEI-rncp.pdf?src-supplier=Digi-Key, ComponentLink3Description=https://www.seielect.com/catalog/SEI-Packaging.pdf?src-supplier=Digi-Key, ComponentLink3URL=https://www.seielect.com/catalog/SEI-Packaging.pdf?src-supplier=Digi-Key, Contact Plating=Tin,Matte, Features="Moisture Resistant,Anti-Sulfur", Height=0.02inch, Lead Free="Lead Free", Length=0.059inch, Manufacturer Part Number=RNCP0603FTD10K0, Mount="Surface Mount", Number of Terminations=2, Packaging="Tape and Reel", Pricing 1="1=0.08330, 10=0.05190, 25=0.05140, 100=0.02220, 250=0.02200, 500=0.02180, 1000=0.01310 (USD)", Radiation Hardening=No, Resistance=10kR, RoHS=Yes, RoHS Compliant=Yes, Series=RNCP, Stock 1=2460, Supplier 1="Arrow Electronics", Supplier Part Number 1=RNCP0603FTD10K0, Width=0.031inch
R3: library part RMCF0402FT499K, "Res Thick Film 0402 499K Ohm 1% 0.063W ±100ppm/°C Molded SMD Paper T/R", Case Code (Imperial)=0402, Case Code (Metric)=1005, Manufacturer="Stackpole Electronics", Max Operating Temperature=155°C, Max Power Dissipation=63mW, Min Operating Temperature=-55°C, Package Quantity=10000, Resistor Type="Thick Film", Temperature Coefficient=100ppm/°C, Tolerance=1%, Case/Package=0402, Category="Chip SMD Resistors", ComponentLink1Description=http://www.seielect.com/Catalog/SEI-RMCF_RMCP.pdf?src-supplier=Digi-Key, ComponentLink1URL=http://www.seielect.com/Catalog/SEI-RMCF_RMCP.pdf?src-supplier=Digi-Key, ComponentLink2Description=https://www.seielect.com/Catalog/SEI-RMCF_RMCP.pdf?src-supplier=Avnet, ComponentLink2URL=https://www.seielect.com/Catalog/SEI-RMCF_RMCP.pdf?src-supplier=Avnet, ComponentLink3Description=https://www.seielect.com/catalog/SEI-Packaging.pdf?src-supplier=Digi-Key, ComponentLink3URL=https://www.seielect.com/catalog/SEI-Packaging.pdf?src-supplier=Digi-Key, ComponentLink4Description=https://www.seielect.com/Catalog/SEI-RMCF_RMCP.pdf?src-supplier=Digi-Key, ComponentLink4URL=https://www.seielect.com/Catalog/SEI-RMCF_RMCP.pdf?src-supplier=Digi-Key, Contact Plating=Tin,Matte, Features="Automotive AEC-Q200", Height=0.016inch, Lead Free="Lead Free", Length=0.039inch, Manufacturer Part Number=RMCF0402FT499K, Mount="Surface Mount", Number of Terminations=2, Packaging="Tape and Reel", Pricing 1="10000=0.00180, 30000=0.00160, 100000=0.00150 (USD)", Resistance=499kR, RoHS=Yes, RoHS Compliant=Yes, Series=RMCF, Stock 1=30000, Supplier 1="Arrow Electronics", Supplier Part Number 1=RMCF0402FT499K, Width=0.02inch
R4 R7 R8 R11: library part RMCF0603FT100K, "RES 100K OHM 1% 1/10W 0603", Case Code (Imperial)=0603, Case Code (Metric)=1608, Manufacturer="Stackpole Electronics", Max Operating Temperature=155°C, Max Power Dissipation=100mW, Min Operating Temperature=-55°C, Resistor Type="Thick Film", Temperature Coefficient=100ppm/°C, Tolerance=1%, Working Voltage=75V, Case/Package=0603, Category="Chip SMD Resistors", ComponentLink1Description=https://datasheet.ciiva.com/15193/getdatasheetpartid-362597-15193437.pdf?src-supplier=Verical, ComponentLink1URL=https://datasheet.ciiva.com/15193/getdatasheetpartid-362597-15193437.pdf?src-supplier=Verical, Construction=Rectangular, Contact Plating=Tin,Matte, Depth=0.8mm, Features="Automotive AEC-Q200", Height=0.022inch, Lead Free="Lead Free", Length=1.55mm, Manufacturer Part Number=RMCF0603FT100K, Military Standard=Not, Mount="Surface Mount", Number of Terminations=2, Packaging="Tape and Reel", Power Rating=100mW, Pricing 1="5000=0.00290, 10000=0.00180 (USD)", Radiation Hardening=No, Resistance=100kR, RoHS=Yes, RoHS Compliant=Yes, Series=RMCF, Stock 1=6345000, Supplier 1="Arrow Electronics", Supplier Part Number 1=RMCF0603FT100K, Width=0.031inch
R6 R12: library part 3386P-1-204LF, "BOURNS   3386P-1-204LF   TRIMMER, 200K", Color=Blue, Manufacturer=Bourns, Max Operating Temperature=125°C, Max Power Dissipation=500mW, Min Operating Temperature=-55°C, Package Quantity=100, Resistance=200kR, Resistance Tolerance=10%, Resistor Type=Cermet, Temperature Coefficient=100ppm/°C, Voltage Rating=300V, Category="Variable Resistors and Potentiometers", ComponentLink1Description=https://datasheet.ciiva.com/11832/0900766b8069ccf9-11832290.pdf?src-supplier=RSComponents, ComponentLink1URL=https://datasheet.ciiva.com/11832/0900766b8069ccf9-11832290.pdf?src-supplier=RSComponents, ComponentLink2Description=https://datasheet.ciiva.com/19482/855421-19482214.pdf?src-supplier=Jameco, ComponentLink2URL=https://datasheet.ciiva.com/19482/855421-19482214.pdf?src-supplier=Jameco, ComponentLink3Description=https://datasheet.ciiva.com/29122/447388-da-01-en-trimmer-tht3386p-1-204lf-200k-0-5w-29122213.pdf?src-supplier=Conrad, ComponentLink3URL=https://datasheet.ciiva.com/29122/447388-da-01-en-trimmer-tht3386p-1-204lf-200k-0-5w-29122213.pdf?src-supplier=Conrad, ComponentLink4Description=https://datasheet.ciiva.com/14108/sa3386-dat-e-14108906.pdf?src-supplier=Distrelec, ComponentLink4URL=https://datasheet.ciiva.com/14108/sa3386-dat-e-14108906.pdf?src-supplier=Distrelec, ComponentLink5Description=https://datasheet.ciiva.com/3266/3386-3266318.pdf?src-supplier=Avnet, ComponentLink5URL=https://datasheet.ciiva.com/3266/3386-3266318.pdf?src-supplier=Avnet, ComponentLink6Description=https://datasheet.ciiva.com/2157/3386-2157945.pdf?src-supplier=Digi-Key, ComponentLink6URL=https://datasheet.ciiva.com/2157/3386-2157945.pdf?src-supplier=Digi-Key, ComponentLink7Description=https://datasheet.ciiva.com/7953/1815119-7953128.pdf?src-supplier=Element14, ComponentLink7URL=https://datasheet.ciiva.com/7953/1815119-7953128.pdf?src-supplier=Element14, Contact Plating=Tin,Matte, Depth=9.53mm, Height=4.83mm, Lead Free="Lead Free", Length=9.53mm, Manufacturer Part Number=3386P-1-204LF, Military Standard=Not, Mount="Through Hole,PCB", Number of Turns=1, Packaging=Rail/Tube, Power Rating=500mW, Pricing 1="1=1.37390, 10=1.11580, 25=1.10460, 50=1.09360, 100=0.96120, 250=0.95150, 500=0.85600, 1000=0.80290, 5000=0.70770 (USD)", Radiation Hardening=No, REACH SVHC="No SVHC", RoHS=Yes, RoHS Compliant=Yes, Series="Trimpot® 3386 - Sealed", Stock 1=15, Supplier 1="Arrow Electronics", Supplier Part Number 1=3386P-1-204LF, Taper=Linear, Technology=CERMET, Termination=Pin, Tolerance=10%, Weight=0.03oz, Width=9.53mm
R9 R10: library part 15.8kResistor, "Res Thick Film 0201 15.8K Ohm 1% 0.05W ±200ppm/°C Molded SMD T/R", Case Code (Imperial)=0201, Case Code (Metric)=0603, Manufacturer=Panasonic, Manufacturer Part Number=ERJ-1GNF1582C, Max Operating Temperature=125°C, Max Power Dissipation=50mW, Min Operating Temperature=-55°C, Package Quantity=15000, Resistance=15.8kR, Resistor Type="Thick Film", Supplier Part Number 1=667-ERJ-1GNF1582C, Temperature Coefficient=200ppm/°C, Tolerance=1%, Voltage Rating=25V, Case/Package=0201, Category="Chip SMD Resistors", ComponentLink1Description=http://www.mouser.com/ds/2/315/AOA0000CE2-37512.pdf?src-supplier=Mouser, ComponentLink1URL=http://www.mouser.com/ds/2/315/AOA0000CE2-37512.pdf?src-supplier=Mouser, ComponentLink2Description=http://www.onlinecomponents.com/datasheet/erj-1gnf1582c.aspx?p=44466414&src-supplier=Onlinecomponents.com, ComponentLink2URL=http://www.onlinecomponents.com/datasheet/erj-1gnf1582c.aspx?p=44466414&src-supplier=Onlinecomponents.com, ComponentLink3Description=https://industrial.panasonic.com/cdbs/www-data/pdf/RDA0000/AOA0000C304.pdf?src-supplier=Digi-Key, ComponentLink3URL=https://industrial.panasonic.com/cdbs/www-data/pdf/RDA0000/AOA0000C304.pdf?src-supplier=Digi-Key, ComponentLink4Description=https://industrial.panasonic.com/cdbs/www-data/pdf/RDM0000/DMM0000COL11.pdf?src-supplier=Digi-Key, ComponentLink4URL=https://industrial.panasonic.com/cdbs/www-data/pdf/RDM0000/DMM0000COL11.pdf?src-supplier=Digi-Key, ComponentLink5Description=http://industrial.panasonic.com/www-cgi/jvcr13pz.cgi?E+PZ+3+AOA0002+ERJ1GNF1582C+7+WW?src-supplier=Digi-Key, ComponentLink5URL=http://industrial.panasonic.com/www-cgi/jvcr13pz.cgi?E+PZ+3+AOA0002+ERJ1GNF1582C+7+WW?src-supplier=Digi-Key, Contact Plating=Tin,Matte, Features="Automotive AEC-Q200", Height=0.01inch, Length=0.024inch, Mount="Surface Mount", Number of Terminations=2, Packaging="Tape and Reel", Power Rating=50mW, Pricing 1="1=0.12000, 10=0.06200, 50=0.06200, 100=0.02600, 1000=0.01200, 10000=0.00900 (USD)", Radiation Hardening=No, RoHS=Yes, Stock 1=10000, Supplier 1=Mouser, Termination=SMD/SMT, Width=0.3mm
SIC1: library part SIC437BED-T1-GE3, "Conv DC-DC 4.5V to 28V Synchronous Step Down Single-Out 0.6V 12A 24-Pin MLPQ EP T/R", Manufacturer="Vishay Siliconix", Max Input Voltage=28V, Max Operating Temperature=125°C, Max Output Voltage=20V, Min Input Voltage=3V, Min Operating Temperature=-40°C, Min Output Voltage=600mV, Output Current=12A, Switching Frequency=1MHz, Category="Voltage Regulator", ComponentLink1Description=http://www.vishay.com/docs/75921/sic437.pdf?src-supplier=Digi-Key, ComponentLink1URL=http://www.vishay.com/docs/75921/sic437.pdf?src-supplier=Digi-Key, Manufacturer Part Number=SIC437BED-T1-GE3, Mount="Surface Mount", Number of Outputs=1, Number of Pins=24, Output Configuration=Positive, Output Type=Adjustable, Packaging="Cut Tape", Pricing 1="1=2.88000, 10=2.58200, 25=2.44120, 100=2.11560, 250=2.00708, 500=1.80096, 1000=1.68878 (USD)", RoHS=Yes, RoHS Compliant=Yes, Stock 1=33, Supplier 1="Arrow Electronics", Supplier Part Number 1=SIC437BED-T1-GE3, Synchronous Rectifier=Yes

## Via types
v1: diameter 0.6 (per signal layer), hole 0.3, Top Layer to Int1 (GND), tented both sides, 4 vias

## Nets (pads, with @x,y where several pads share a name; then routed paths per layer and width w, separated by ;. In a path a pad name is that pad's centre, name@x,y a point inside that pad or via, vN(x,y) a via of type N, cw(c..) or ccw(c..) an arc to the next point about the centre after c; other vN are vias at no path point)
+VCC: C3.2 C4.2 C10.2 C11.2 J2.P SIC1.1 SIC1.2 SIC1.22 SIC1.26 | length 1.4
  Top Layer w0.25: SIC1.22 18.689,31.866 19.134,31.866 SIC1.26
  Top Layer w1: J2.P@14.4,6.9 J2.P@14.5,7 ; C3.2 C3.2@19.022,27.475
  other v1: 15,27 16,27 15,28 16,28
GND: C2.2 C3.1 C4.1 C5.1 C6.2 C7.2 C10.1 C11.1 C13.1 C14.1 C15.1 C17.1 J1.1 J2.N J3.N J5.N PMIC1.7 PMIC1.9 R5.2 R10.1 R11.1 R12.3 SIC1.3 SIC1.4 SIC1.13 SIC1.16 SIC1.25 SIC1.27 | length 30.8
  Top Layer w0.25: C2.2 17.403,39.253 19.637,37.019 SIC1.16 19.637,32.977 SIC1.25 19.712,33.164 20.112,33.564 20.653,33.564 20.964,33.875 20.964,34.195 SIC1.13 20.987,34.294 20.989,34.297 20.989,34.692 22.075,35.777 22.075,36.625 C5.1 ; PMIC1.9@40.565,45.535 PMIC1.9
  Top Layer w0.3: J2.N@21.5,7 J2.N@21.6,6.9 ; R11.1@45.3,44.901 R10.1
  Top Layer w0.5: R5.2 23.199,42.449 23.199,37.851 C5.1 ; PMIC1.9@40.565,45.535 PMIC1.7 ; PMIC1.9 R11.1 R11.1@45.3,44.901
  Top Layer w1: J2.N@21.6,6.9 J2.N@21.75,7.05 ; C3.1@21.747,27.556 C3.1 C3.1@21.875,27.428
NetC1_1: C1.1 SIC1.23 | length 8.9
  Top Layer w0.25: 11.982,31.418 SIC1.23
  Top Layer w0.3: C1.1@10.403,31.953 C1.1 10.503,32.1 11.3,32.1 11.982,31.418
NetC1_2: C1.2 R1.1 | length 0
  Top Layer w0.3: C1.2@7.595,32.198 C1.2
NetC2_1: C2.1 R2.2 R3.2 R4.2 SIC1.15 | length 20.6
  Top Layer w0.25: R2.2@19.252,39.512 20.087,38.677 SIC1.15
  Top Layer w0.3: R4.2@14.3,33.899 14.414,33.899 14.636,34.121 R3.2 ; R4.2 14.392,33.924 14.597,34.129 C2.1 14.824,39.727 14.824,40.824 15,41 18.5,41 19,40.5 19,39.802 R2.2 R2.2@19.252,39.512
NetC5_2: C5.2 SIC1.12 | length 5.7
  Top Layer w0.15: SIC1.12 21.51,34.291 21.51,34.54 23.47,36.5 24.5,36.5 25.1,37.1 C5.2
NetC6_1: C6.1 C7.1 C17.2 J3.P L1.2 PMIC1.2 PMIC1.3 R6.2 SIC1.18 | length 1.2
  Top Layer w0.25: 17.6,34.1 17.782,33.918 SIC1.18
NetC12_1: C12.1 L2.1 PMIC1.8 | length 0.4
  Top Layer w0.5: PMIC1.8@39.295,47.175 PMIC1.8
NetC12_2: C12.2 PMIC1.1 | length 4
  Top Layer w0.5: C12.2 36.903,44.194 37.726,44.194 39.295,42.625 PMIC1.1
NetC13_2: C13.2 C14.2 C15.2 J5.P L2.2 R8.2 | length 9
  Top Layer w0.5: L2.2 37.352,65.85 R8.2
NetC16_1: C16.1 R10.2 | length 2.5
  Top Layer w0.3: C16.1 R10.2
NetC16_2: C16.2 PMIC1.6 | length 2.1
  Top Layer w0.5: C16.2 41.83,49.675 41.835,49.67 PMIC1.6
NetJ1_2: J1.2 SIC1.19 | length 1.2
  Top Layer w0.25: 17.5,33.6 17.632,33.468 SIC1.19
NetJ1_3: J1.3 R2.1 SIC1.14 | length 5.3
  Top Layer w0.25: SIC1.14@20.548,34.305 R2.1
  Top Layer w0.3: SIC1.14 20.537,34.294 SIC1.14@20.548,34.305
NetL1_1: L1.1 SIC1.5 SIC1.6 SIC1.7 SIC1.8 SIC1.9
NetPMIC1_4: PMIC1.4 R7.2 | length 2.2
  Top Layer w0.5: PMIC1.4 R7.2
NetPMIC1_5: PMIC1.5 R9.1 R12.2 | length 6.5
  Top Layer w0.3: R9.1 56.25,65.85 R12.2
NetR1_2: R1.2 SIC1.24 | length 8.9
  Top Layer w0.25: 13.393,30.968 SIC1.24
  Top Layer w0.3: R1.2 11.525,29.1 13.393,30.968
NetR3_1: R3.1 SIC1.20 | length 2.3
  Top Layer w0.25: R3.1@16.459,33.02 SIC1.20@18.685,33.02
  Top Layer w0.3: R3.1 R3.1@16.459,33.02 ; SIC1.20@18.685,33.02 SIC1.20
NetR4_1: R4.1 SIC1.21 | length 4.6
  Top Layer w0.25: R4.1@14.3,32.502 14.502,32.3 18.2,32.3 18.466,32.566 18.685,32.566 SIC1.21
NetR5_1: R5.1 R6.3 SIC1.17 | length 17
  Top Layer w0.25: 18.9,35.5 19.187,35.213 SIC1.17
  Top Layer w0.5: R6.3 6.36,42.44 21.792,42.44 R5.1
NetR7_1: R7.1 R11.2 | length 2.7
  Top Layer w0.5: R7.1 R11.2
NetR8_1: R8.1 R9.2 | length 1.5
  Top Layer w0.3: R8.1 R9.2
pads on no net: J1.4 R6.1 R12.1 SIC1.10 SIC1.11 SIC1.28

## Polygon pours and split planes (outlines as drawn)
NetC6_1 on Top Layer "NETC6_1_L01_P006" (solid, pour order 6): 40.1,24 40.1,39.5 89.1,39.5 89.1,24
GND on Top Layer "GND_L01_P001" (solid, pour order 1): 20.6,30.697 20.6,29.025 21.15,28.475 21.15,0.6 21.125,0.575 21.15,0.55 79.425,0.55 79.475,0.6 89.1,0.6 89.1,22.875 79.375,22.875 29.559,22.875 21.737,30.697
GND on Top Layer "GND_L01_P019" (solid, pour order 19): 33.5,69.5 33.5,99.5 27,99.5 27,69.5
NetC12_1 on Top Layer "NETC12_1_L01_P018" (solid, pour order 18): 34.8,46.75 39.75,46.75 39.75,56.5 34.8,56.5
NetC13_2 on Top Layer "NETC13_2_L01_P016" (solid, pour order 16): 39.75,64.25 34.75,64.25 34.75,99.5 39.5,99.5 39.75,99.75
NetC6_1 on Top Layer "NETC6_2_L01_P015" (solid, pour order 15): 40.15,43.05 42.25,43.05 42.25,41.35 44.3,39.3 40.097,39.3
+VCC on Top Layer "+VCC_L01_P010" (solid, pour order 10): 19.187,30.697 19.187,30.687 18.6,30.1 14.425,30.1 5.8,21.475 5.8,5.3 10.6,0.5 19.9,0.5 19.9,28.8 20.239,29.139 20.239,30.761 20.2,30.8 20.097,30.697
NetL1_1 on Top Layer "NETL1_1_L01_P005" (solid, pour order 5): 22.008,30.815 23.185,30.815 29.9,24.1 36.025,24.1 36.025,41.3 30.591,41.3 22.462,33.171 22.008,33.171
GND on Top Layer "GND_L01_P000" (solid, pour order 0): 19.2,33.7 21,33.7 21,32.1 19.2,32.1
no net on Int1 (GND) (split plane): 89.49,0.51 0.51,0.51 0.51,99.49 89.49,99.49
no net on Int2 (GND) (split plane): 89.49,0.51 0.51,0.51 0.51,99.49 89.49,99.49

## Text inside footprints (layer, text, board x,y; h text height)
SIC1: Top Overlay "*" at 20.335,29.586 h1.27 r90; Mechanical 13 "*" at 18.303,30.094 h1.27 r90